# EAGLE board RAC-power (EAGLE 9.4.2)
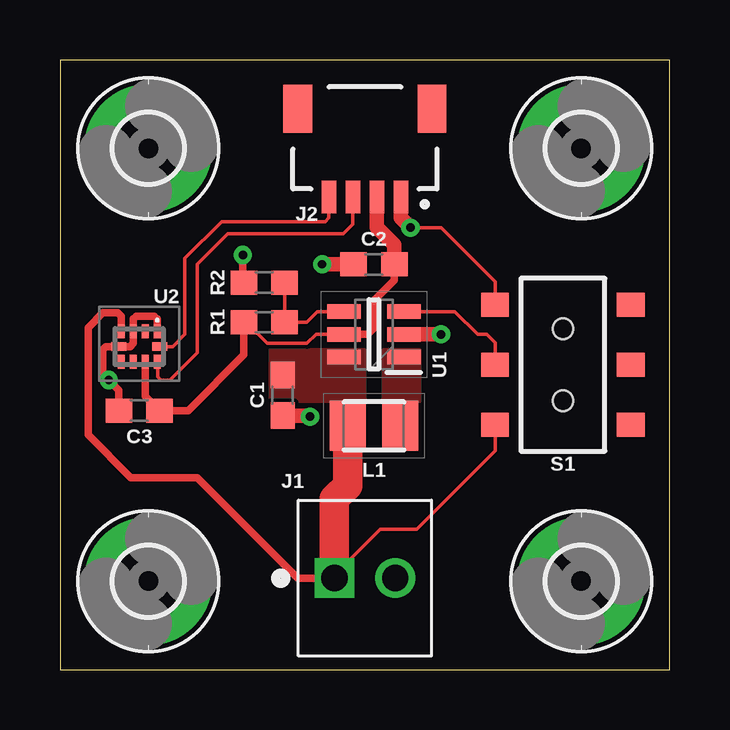
[diagram p0: board, top side]
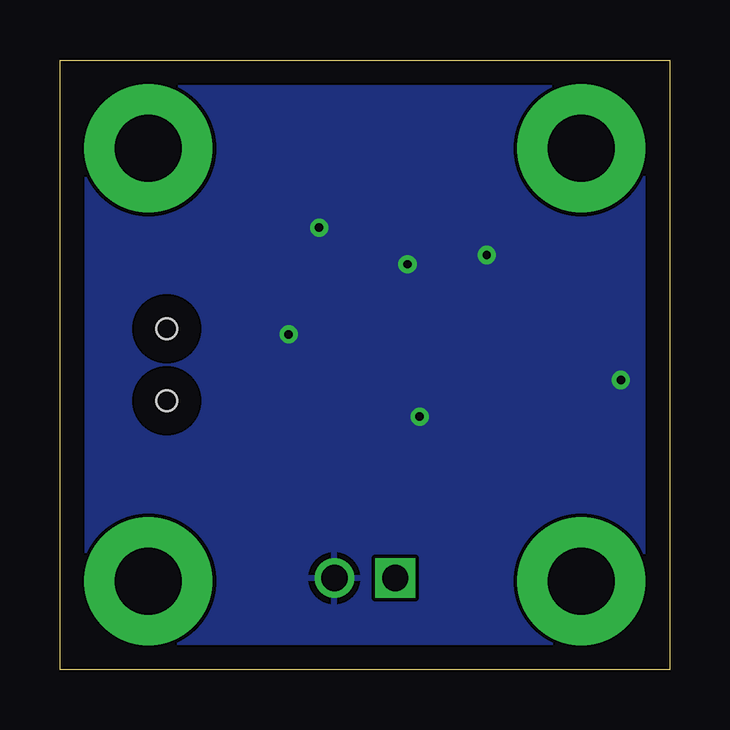
[diagram p1: board, bottom side, seen from below]

Size 25.4 x 25.4 mm. Coordinates in mm from the lower left corner, seen from the top.
Outline: 0,0 25.4,0 25.4,25.4 0,25.4 0,0
Copper layers (1*16): Top 0.035mm / dielectric 1.5mm / Bottom 0.035mm
Design rules "default": minimum track width 6mil, minimum drill 0.35mm, track to track 6mil, track to pad 6mil, pad to pad 6mil, via to via 6mil, smd to smd 6mil, copper to edge 40mil, drill to drill 6mil, minimum pad ring 10mil, minimum via ring 8mil, stop-mask expansion 4mil, vias tented up to drill 0mil, thermal gap 10mil

## Footprints (pad centres in the part's own frame; a part is rotated, then mirrored left to right if it is on the bottom)
0603 = smd 1.1 x 1: 1 -0.85,0; 2 0.85,0
2,8-PAD = drill 2.8 pad 5.334: B2,8 0,0
CONN_282834-2 = drill 1.1 square: 1 -1.27,0 | drill 1.1: 2 1.27,0
JST04_1MM_RA = smd 0.6 x 1.35: 1 -1.5,0; 2 -0.5,0; 3 0.5,0; 4 1.5,0 | smd 1.2 x 2: NC1 2.8,-3.675; NC2 -2.8,-3.675
INDM2520X120N = smd 1.5 x 2.1: 1 -1.1,0; 2 1.1,0
SWITCH_DPDT_SMD_AYZ0202 = smd 1 x 1.15: 1 -2.5,2.825; 2 0,2.825; 3 2.5,2.825; 4 -2.5,-2.825; 5 0,-2.825; 6 2.5,-2.825 | hole 0.85: 1.5,0; -1.5,0
SOT95P270X145-6N = smd 1.4 x 0.6: 1 -1.25,0.95; 2 -1.25,0; 3 -1.25,-0.95; 4 1.25,-0.95; 5 1.25,0; 6 1.25,0.95
TLA2022IRUGR = smd 0.3 x 0.58: 1 -0.75,-0.64; 2 -0.25,-0.64; 3 0.25,-0.64; 4 0.75,-0.64; 6 0.75,0.64; 7 0.25,0.64; 8 -0.25,0.64; 9 -0.75,0.64 | smd 0.63 x 0.35: 5 0.86,0; 10 -0.86,0

## Placement (x,y rotation side)
C1  10uF  [0603]  9.27,11.43 270 top
C2  10uF  [0603]  13.08,16.89 180 top
C3  0.1uF  [0603]  3.3,10.79 180 top
H1  MOUNT-PAD-ROUND2.8  [2,8-PAD]  3.68,21.72 0 top
H2  MOUNT-PAD-ROUND2.8  [2,8-PAD]  21.72,21.72 0 top
H3  MOUNT-PAD-ROUND2.8  [2,8-PAD]  3.68,3.68 0 top
H4  MOUNT-PAD-ROUND2.8  [2,8-PAD]  21.72,3.68 0 top
J1  282834-2  [CONN_282834-2]  12.7,3.81 0 top
J2  [JST04_1MM_RA]  12.7,19.68 180 top
L1  MAMK2520T4R7M  [INDM2520X120N]  13.08,10.16 0 top
R1  348k  [0603]  8.51,14.48 180 top
R2  200k  [0603]  8.51,16.13 0 top
S1  [SWITCH_DPDT_SMD_AYZ0202]  20.95,12.7 90 top
U1  MCP1640  [SOT95P270X145-6N]  13.08,13.97 180 top
U2  TLA2022  [TLA2022IRUGR]  3.3,13.46 180 top

## Library data of the parts
C1 C2 = SparkFun-Capacitors; PROD_ID: CAP-11015
C3 = SparkFun-Capacitors; PROD_ID: CAP-00810
H1-H4 = holes
J1 = RAC-Altimeter; CENTERLINE_PITCH: 2.54 mm[.1 in]; COMMENT: 282834-2; DESCRIPTION: TERMI-BLOK PCB MOUNT, 90 2P.; DIGI-KEY_PART_NUMBER: A98333-ND; DIGI-KEY_PURCHASE_URL: https://www.digikey.com/product-detail/en/te-connectivity-amp-connectors/282834-2/A98333-ND/1150135?utm_source=snapeda&utm_medium=aggregator&utm_campaign=symbol; EU_ROHS_COMPLIANCE: Compliant with Exemptions; MF: TE Connectivity; MP: 282834-2; NUMBER_OF_POSITIONS: 2; PACKAGE: None; TE_PURCHASE_URL: https://www.te.com/usa-en/product-282834-2.html?te_bu=Cor&te_type=disp&te_campaign=seda_glo_cor-seda-global-disp-prtnr-fy19-seda-model-bom-cta_sma-317_1&elqCampaignId=32493
J2 = SparkFun-Connectors; PROD_ID: CONN-13694
L1 = RAC-Altimeter; DESCRIPTION: TAIYO YUDEN - MAMK2520T4R7M - INDUCTOR, SHIELDED, 4.7UH, 1.5A, SMD; HEIGHT: 1.2mm; MANUFACTURER_NAME: TAIYO YUDEN; MANUFACTURER_PART_NUMBER: MAMK2520T4R7M
R1 = SparkFun-Resistors; PROD_ID: RES-12533
R2 = SparkFun-Resistors; PROD_ID: RES-09385
S1 = SparkFun-Switches; PROD_ID: SWCH-08179; SF_ID: COM-00597
U1 = RAC-Altimeter; DESCRIPTION: Microchip MCP1640T-I/CHY, Boost Converter, Step Up 0.35A Adjustable, 2 5.5 V, 575 kHz, 6-pin SOT-23; HEIGHT: 1.45mm; MANUFACTURER_NAME: Microchip; MANUFACTURER_PART_NUMBER: MCP1640T-I/CHY; MOUSER_PART_NUMBER: 579-MCP1640TI/CHY; MOUSER_PRICE-STOCK: https://www.mouser.com/Search/Refine.aspx?Keyword=579-MCP1640TI%2FCHY
U2 = RAC-Altimeter; DESCRIPTION: 12-Bit 1-Ch Delta-Sigma ADC w/ Voltage Reference, Oscillator, PGA, and I2C for Low-Cost Applications; HEIGHT: 0.4mm; MANUFACTURER_NAME: Texas Instruments; MANUFACTURER_PART_NUMBER: TLA2022IRUGR; MOUSER_PART_NUMBER: 595-TLA2022IRUGR; MOUSER_PRICE-STOCK: https://www.mouser.com/Search/Refine.aspx?Keyword=595-TLA2022IRUGR

## Nets
EN: S1.2 U1.3
GND: C1.2 C2.2 C3.2 J1.2 J2.1 R2.1 S1.3 U1.2 U2.1 U2.3 U2.5
SCL: J2.4 U2.10
SDA: J2.3 U2.9
SW: L1.2 U1.1
V_BATT: C1.1 J1.1 L1.1 S1.1 U1.6 U2.4
VFB: R1.1 R2.2 U1.4
VOUT: C2.1 C3.1 J2.2 R1.2 U1.5 U2.8

## Tracks (layer width: path | path; a pad name or v marks a point on that pad's centre or on a via)
EN
  Top 0.152: U1.3 16.45,14.92 17.4,13.97 17.78,13.97 18.13,13.62 S1.2
GND  (via drill 0.35)
  Top 0.152: S1.3 18.13,16.16 15.88,18.41 v14.61,18.41
  Top 0.305: U2.1 4.05,14.62 3.94,14.73 3.17,14.73 3.05,14.61 U2.3 3.05,13.59 2.92,13.46 U2.5 1.91,13.46 1.78,13.34 1.78,12.32 v2.03,12.06 2.45,11.64 C3.2 | R2.1 7.62,16.17 v7.62,17.27
  Top 0.61: C2.2 v10.92,16.89 | U1.2 v15.88,13.97 | C1.2 10.38,10.58 v10.41,10.54 | J2.1 14.2,18.82 v14.61,18.41
  pour Bottom (isolate 0): 0,25.4 25.4,25.4 25.4,0 0,0
SCL
  Top 0.152: U2.10 4.7,13.46 5.21,13.97 5.21,17.14 6.73,18.67 11.05,18.67 11.2,18.82 J2.4
SDA
  Top 0.152: U2.9 4.06,12.81 4.06,12.19 4.19,12.06 4.57,12.06 5.71,13.21 5.71,16.89 6.99,18.16 11.81,18.16 12.2,18.55 J2.3
SW
  pour Top (isolate 0.001, no thermals): 13.46,11.18 14.99,11.18 14.99,13.34 13.46,13.34
V_BATT
  Top 0.152: S1.1 18.13,9.11 14.86,5.84 13.34,5.84 11.43,3.94 J1.1
  Top 0.305: U2.4 2.55,14.72 2.41,14.86 1.78,14.86 1.17,14.25 1.17,9.78 2.95,8 5.71,8 9.91,3.81 J1.1
  Top 1.219: J1.1 11.43,7.11 11.98,7.66 L1.1
  pour Top (isolate 0.001, no thermals): 12.7,11.18 8.76,11.18 8.76,13.34 12.7,13.34
VFB
  Top 0.152: U1.4 10.73,14.92 10.29,14.48 R1.1 R2.2
VOUT
  Top 0.152: U1.5 10.67,13.97 10.29,13.59 8.64,13.59 7.75,14.48 R1.2 7.66,14.35
  Top 0.305: U1.5 12.83,13.97 13.08,14.22 13.08,15.37 13.93,16.22 C2.1 | 7.66,14.35 7.66,13.12 5.33,10.79 C3.1 3.55,11.39 U2.8
  Top 0.61: J2.2 13.2,18.42 13.93,17.69 C2.1